# Altium PCB front_pot_plate.PcbDoc
Units mm, origin at the board's own origin, x right, y up, seen from the top; angles counter-clockwise.
Board outline 137.6 x 108 mm, 2 copper layers (Top Layer, Bottom Layer); 26 components, 36 nets, 88 pads, 36 vias.
Unrouted connection lines stored in the file: 1.
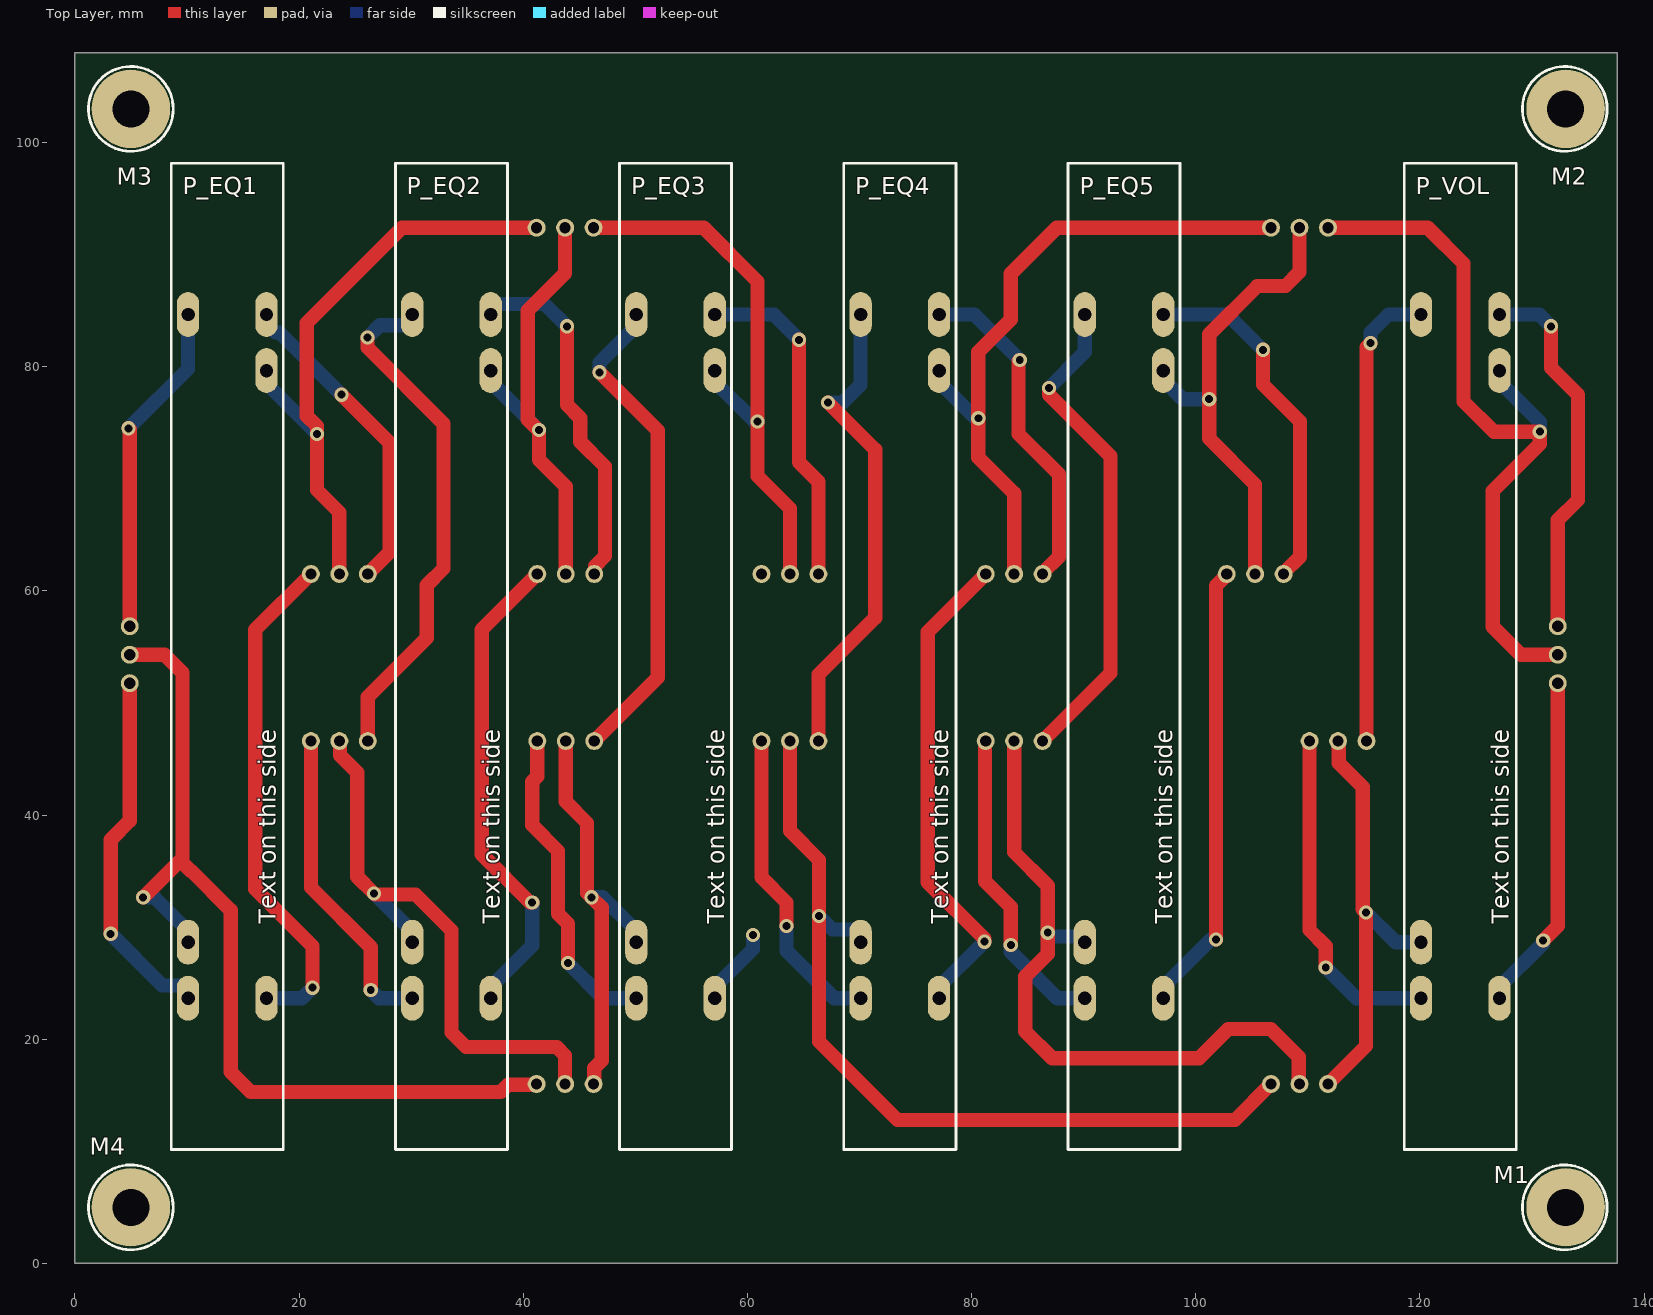
[diagram p0: Top Layer view]
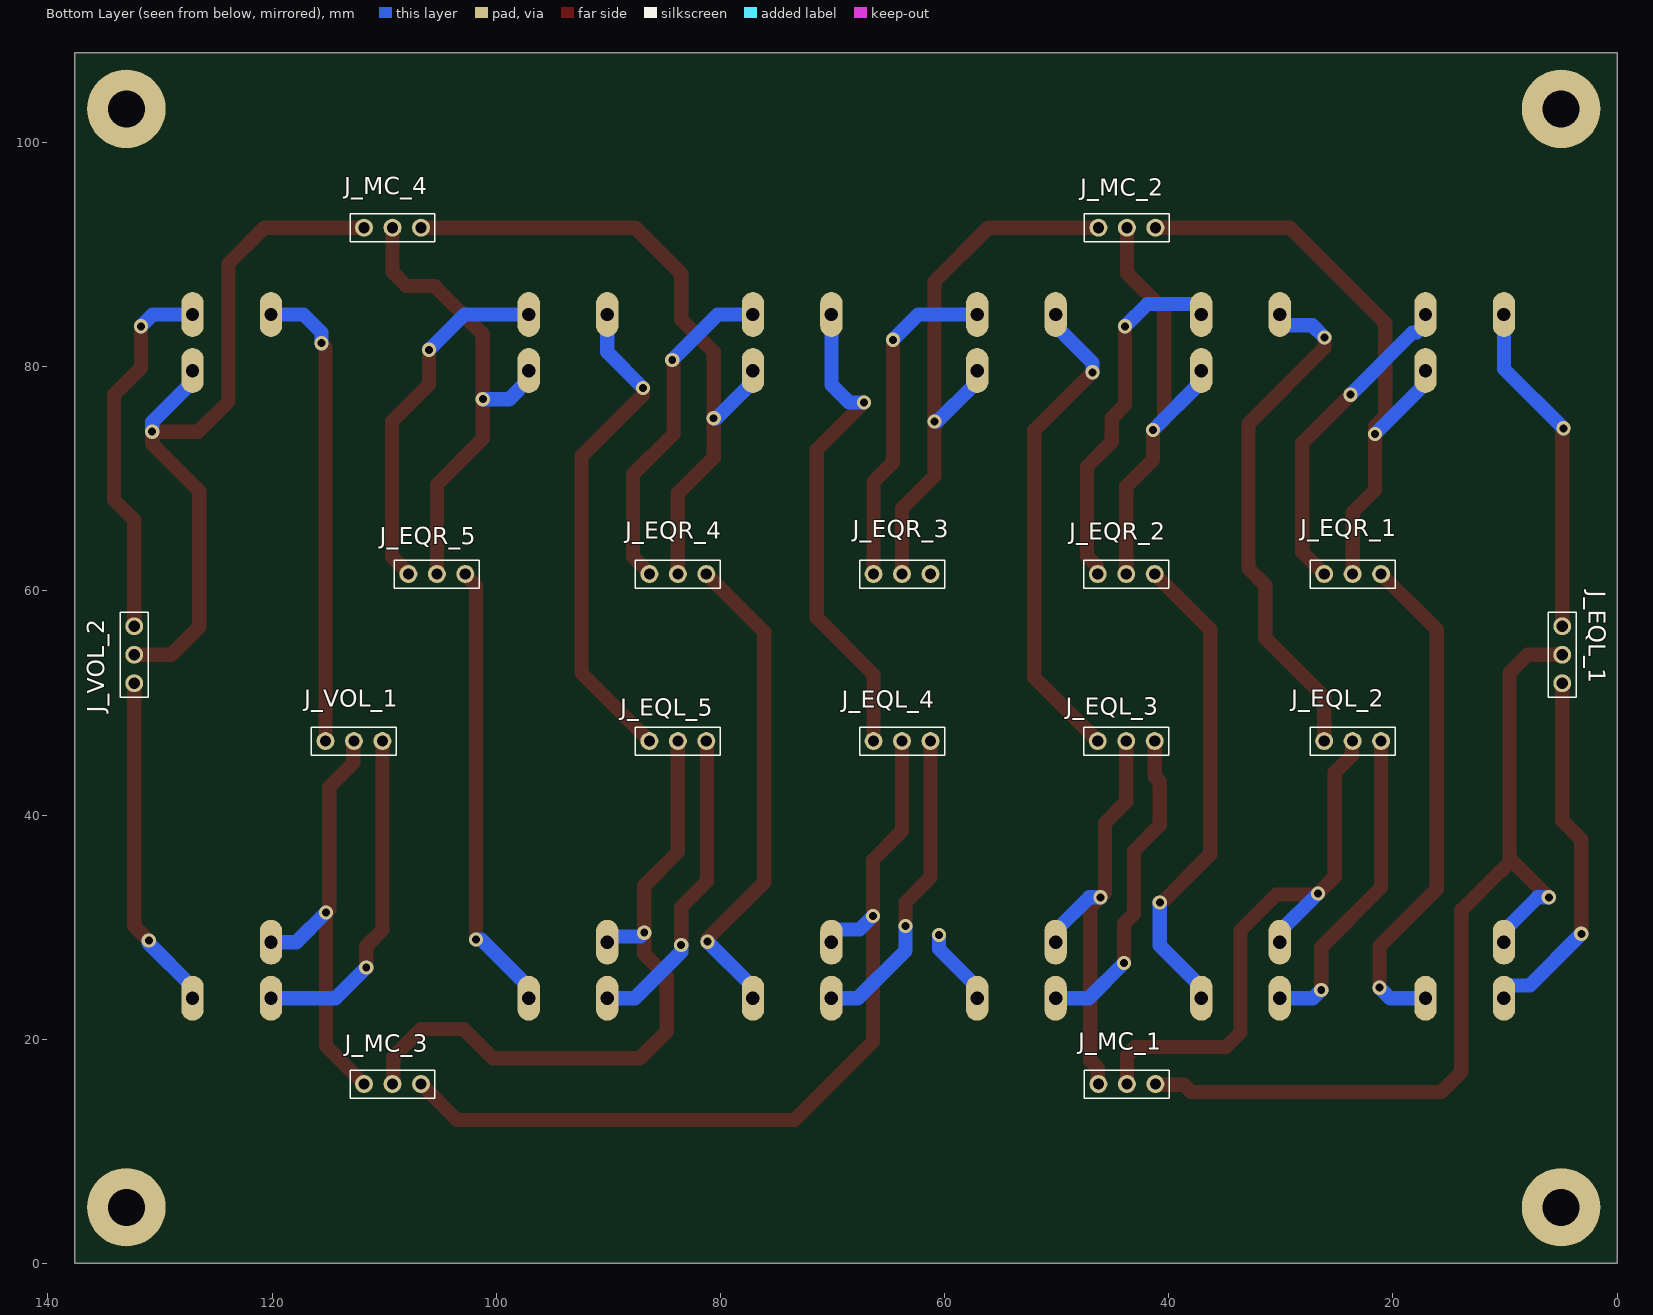
[diagram p1: Bottom Layer view, seen from below]
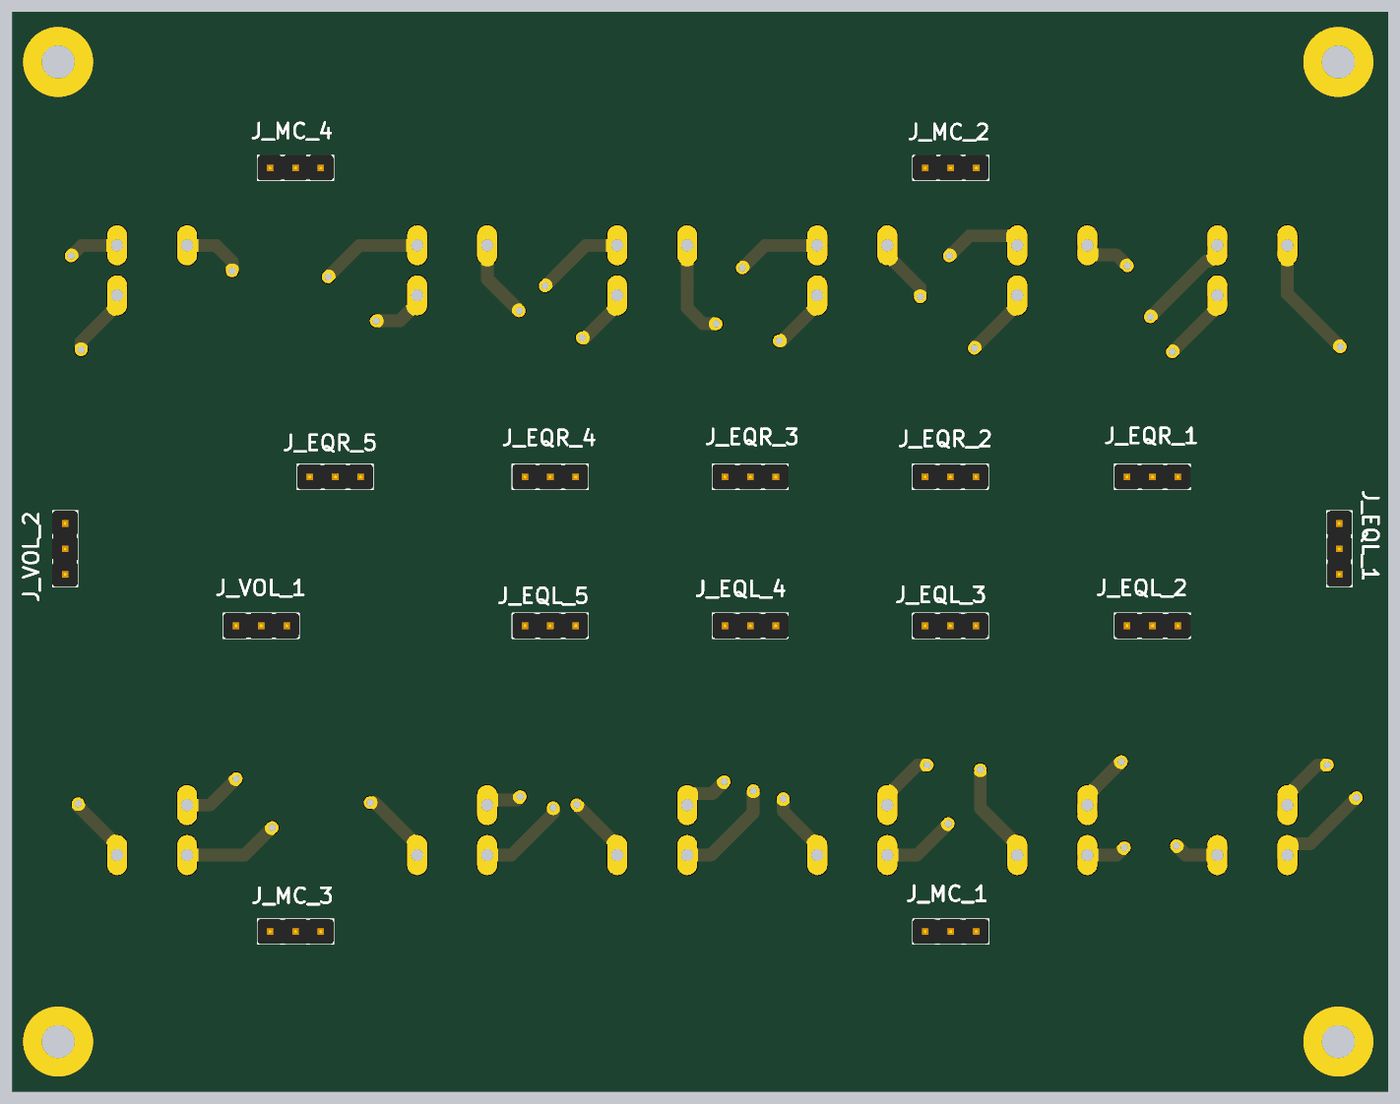
[diagram p2: 3D render of the assembled board from below, using the file's embedded part models]

## Layer stack, top to bottom
Top Solder: solder mask 0.0102, Solder Resist, Dk 3.5
Top Layer: signal copper 0.0356
Dielectric 1: dielectric 0.32, FR-4, Dk 4.8
Bottom Layer: signal copper 0.0356
Bottom Solder: solder mask 0.0102, Solder Resist, Dk 3.5

## Board outline
0,0 137.6,0 137.6,108 0,108

## Design rules (kind name [scope] priority, off if disabled: settings)
Clearance [All] p1: gap=0.254 ignorepadtopadclearanceinfootprint=FALSE except(0: Arc-Hole Track-Hole SMDPad-Hole THPad-Hole Via-Hole Fill-Hole Poly-Hole Region-Hole Text-Hole; 0.508: THPad-THPad; 0.762: Arc-THPad Track-THPad; 1.016: Arc-Arc Arc-Track Arc-Via Track-Track Track-Via)
PolygonConnect [All] p1: connectstyle=Relief reliefconductorwidth=0.254 reliefentries=4 polygonreliefangle="90 Angle" airgapwidth=0.254
RoutingVias [All] p1: holewidth=0.711 width=1.27 viastyle="Through Hole" minholewidth=0.711 minwidth=1.27 maxholewidth=0.711 maxwidth=1.27
SolderMaskExpansion [All] p1: expansion=0.102 istentingtop=FALSE
Width [All] p1: maxlimit=1.27 minlimit=0.762 preferedwidth=1.016 minimp=50.000000 maximp=50.000000 favimp=50.000000
30 further rules are at their usual default settings.

## Components (designator, comment, footprint, x,y, rotation, side; value= is the part's Value field where it differs from the comment)
J_EQL_1 "Header 1x3" "Header 1x3" 4.9,56.84 r270 bottom
J_EQL_2 "Header 1x3" "Header 1x3" 26.14,46.6 r180 bottom
J_EQL_3 "Header 1x3" "Header 1x3" 46.34,46.6 r180 bottom
J_EQL_4 "Header 1x3" "Header 1x3" 66.34,46.6 r180 bottom
J_EQL_5 "Header 1x3" "Header 1x3" 86.34,46.6 r180 bottom
J_EQR_1 "Header 1x3" "Header 1x3" 26.14,61.5 r180 bottom
J_EQR_2 "Header 1x3" "Header 1x3" 46.34,61.5 r180 bottom
J_EQR_3 "Header 1x3" "Header 1x3" 66.34,61.5 r180 bottom
J_EQR_4 "Header 1x3" "Header 1x3" 86.34,61.5 r180 bottom
J_EQR_5 "Header 1x3" "Header 1x3" 107.84,61.5 r180 bottom
J_MC_1 "Header 1x3" "Header 1x3" 41.2,16 r0 bottom
J_MC_2 "Header 1x3" "Header 1x3" 41.2,92.4 r0 bottom
J_MC_3 "Header 1x3" "Header 1x3" 106.72,16 r0 bottom
J_MC_4 "Header 1x3" "Header 1x3" 106.72,92.4 r0 bottom
J_VOL_1 "Header 1x3" "Header 1x3" 115.24,46.6 r180 bottom
J_VOL_2 "Header 1x3" "Header 1x3" 132.3,56.84 r270 bottom
M1 "Screw Hole" "M3 Hole"#1 132.922,5 r0 top
M2 "Screw Hole" "M3 Hole"#1 132.922,103 r0 top
M3 "Screw Hole" "M3 Hole"#2 5,103 r0 top
M4 "Screw Hole" "M3 Hole"#2 5,5 r0 top
P_EQ1 "stereo_pot" "POT STEREO LOOOOONG" 13.6,54.155 r0 top
P_EQ2 "stereo_pot" "POT STEREO LOOOOONG" 33.6,54.155 r0 top
P_EQ3 "stereo_pot" "POT STEREO LOOOOONG" 53.6,54.155 r0 top
P_EQ4 "stereo_pot" "POT STEREO LOOOOONG" 73.6,54.155 r0 top
P_EQ5 "stereo_pot" "POT STEREO LOOOOONG" 93.6,54.155 r0 top
P_VOL "stereo_pot" "POT STEREO LOOOOONG" 123.6,54.155 r0 top

## Footprints (in the part's own frame and the unit in brackets; to place one, negate y for a bottom-side part, rotate by r counter-clockwise, add the part's x,y. Pads: shape width x height; smd on the part's side, far side on the other; paste and mask are expansions set on the pad)
"Header 1x3" [mm]
  round 1.6 hole 1: 1(0,0) 2(2.54,0) 3(5.08,0)
  silkscreen extent -1.25,-1.25 6.33,1.25, body extent -1.26,-1.28 6.36,1.26, height 8.89
"M3 Hole"#1 [mm]
  round 7 hole 3.3 mask+0: 1(0.078,0)
  silkscreen extent -3.78,-3.78 3.79,3.78
"M3 Hole"#2 [mm]
  round 7 hole 3.3 mask+0: 1(0,0)
  silkscreen extent -3.78,-3.78 3.79,3.78
"POT STEREO LOOOOONG" [mm]
  oval 2x4 hole 1.2: 1(-3.5,-30.5) 2(-3.5,30.5) 3(-3.5,-25.5) 4(3.5,-30.5) 5(3.5,30.5) 6(3.5,25.5)
  silkscreen extent -5,-44 5,44

## Via types
v1: diameter 1.27, hole 0.711, Top Layer to Bottom Layer, 36 vias

## Nets (pads, with @x,y where several pads share a name; then routed paths per layer and width w, separated by ;. In a path a pad name is that pad's centre, name@x,y a point inside that pad or via, vN(x,y) a via of type N, cw(c..) or ccw(c..) an arc to the next point about the centre after c; other vN are vias at no path point)
NetJ_EQL_1_1: J_EQL_1.1 P_EQ1.2 | length 30.1
  Top Layer w1.27: v1(4.8,74.5) 4.9,74.4 J_EQL_1.1
  Bottom Layer w1.27: v1(4.8,74.5) 10.1,79.8 P_EQ1.2
NetJ_EQL_1_2: J_EQL_1.2 J_MC_1.1 P_EQ1.3 | length 83
  Top Layer w1.27: J_EQL_1.2 8,54.3 9.6,52.7 9.6,36 ; v1(6.1,32.655) 9.445,36 9.6,36 ; J_MC_1.1 41.137,15.937 38.637,15.937 38,15.3 15.7,15.3 13.9,17.1 13.9,31.5 10.4,35 10.344,35 9.6,35.744 9.6,36
  Bottom Layer w1.27: v1(6.1,32.655) 7.1,32.655 10.1,29.655 P_EQ1.3 P_EQ1.3@10.1,27.853
NetJ_EQL_1_3: J_EQL_1.3 P_EQ1.1 | length 32.8
  Top Layer w1.27: v1(3.2,29.4) 3.2,37.8 4.9,39.5 J_EQL_1.3
  Bottom Layer w1.27: v1(3.2,29.4) 7.805,24.795 9.763,24.795 10.1,24.457 P_EQ1.1
NetJ_EQL_2_1: J_EQL_2.1 P_EQ2.2 | length 46.8
  Top Layer w1.27: v1(26.1,82.6) 26.1,81.7 32.9,74.9 32.9,62 31.4,60.5 31.4,55.8 26.14,50.54 J_EQL_2.1
  Bottom Layer w1.27: v1(26.1,82.6) 27.195,83.695 29.763,83.695 30.1,84.032 P_EQ2.2
NetJ_EQL_2_2: J_EQL_2.2 J_MC_1.2 P_EQ2.3 | length 51.5
  Top Layer w1.27: J_EQL_2.2 23.663,46.537 23.663,45.337 25.2,43.8 25.2,34.5 v1(26.7,33) 26.8,32.9 30.4,32.9 33.6,29.7 33.6,20.6 34.9,19.3 42.996,19.3 43.74,18.556 J_MC_1.2
  Bottom Layer w1.27: v1(26.7,33) 30.1,29.6 P_EQ2.3
NetJ_EQL_2_3: J_EQL_2.3 P_EQ2.1 | length 28.4
  Top Layer w1.27: J_EQL_2.3 21.06,33.54 26.4,28.2 v1(26.4,24.4)
  Bottom Layer w1.27: v1(26.4,24.4) 27.145,23.655 P_EQ2.1
NetJ_EQL_3_1: J_EQL_3.1 P_EQ3.2 | length 43.9
  Top Layer w1.27: J_EQL_3.1 52,52.26 52,74.3 v1(46.8,79.5)
  Bottom Layer w1.27: v1(46.8,79.5) 46.8,80.355 50.1,83.655 P_EQ3.2
NetJ_EQL_3_2: J_EQL_3.2 J_MC_1.3 P_EQ3.3 | length 38.5
  Top Layer w1.27: J_EQL_3.2 43.8,41.2 45.7,39.3 45.7,33.055 v1(46.1,32.655) 47,31.755 47,18.1 46.343,17.443 46.343,16.063 J_MC_1.3
  Bottom Layer w1.27: v1(46.1,32.655) 47.1,32.655 50.1,29.655 P_EQ3.3
NetJ_EQL_3_3: J_EQL_3.3 P_EQ3.1 | length 28.7
  Top Layer w1.27: J_EQL_3.3 41.26,43.435 40.8,42.975 40.8,39.1 43.1,36.8 43.1,31.2 44,30.3 v1(44,26.8)
  Bottom Layer w1.27: v1(44,26.8) 47.145,23.655 P_EQ3.1
NetJ_EQL_4_1: J_EQL_4.1 P_EQ4.2 | length 43.9
  Top Layer w1.27: J_EQL_4.1 66.34,52.54 71.4,57.6 71.4,72.6 v1(67.2,76.8)
  Bottom Layer w1.27: v1(67.2,76.8) 68.51,76.8 70.1,78.39 P_EQ4.2
NetJ_EQL_4_2: J_EQL_4.2 J_MC_3.1 P_EQ4.3 | length 77.6
  Top Layer w1.27: J_EQL_4.2 63.8,38.6 66.4,36 v1(66.4,31) 66.4,19.8 73.4,12.8 103.495,12.8 106.695,16 J_MC_3.1
  Bottom Layer w1.27: v1(66.4,31) 67.605,29.795 69.763,29.795 70.1,29.457 P_EQ4.3
NetJ_EQL_4_3: J_EQL_4.3 P_EQ4.1 | length 28
  Top Layer w1.27: J_EQL_4.3 61.26,34.44 63.5,32.2 v1(63.5,30.1)
  Bottom Layer w1.27: v1(63.5,30.1) 63.5,27.9 67.745,23.655 P_EQ4.1
NetJ_EQL_5_1: J_EQL_5.1 P_EQ5.2 | length 44.2
  Top Layer w1.27: J_EQL_5.1 92.4,52.66 92.4,72 86.9,77.5 v1(86.9,78.1)
  Bottom Layer w1.27: v1(86.9,78.1) 90.1,81.3 P_EQ5.2
NetJ_EQL_5_2: J_EQL_5.2 J_MC_3.2 P_EQ5.3 | length 61.7
  Top Layer w1.27: J_EQL_5.2 83.8,36.7 86.8,33.7 v1(86.8,29.5) 86.8,27.6 84.8,25.6 84.8,20.7 87.2,18.3 100.3,18.3 102.9,20.9 106.7,20.9 109.197,18.403 109.197,16.063 J_MC_3.2
  Bottom Layer w1.27: v1(86.8,29.5) 87.137,29.163 89.763,29.163 90.1,28.826 P_EQ5.3
NetJ_EQL_5_3: J_EQL_5.3 P_EQ5.1 | length 28.1
  Top Layer w1.27: J_EQL_5.3 81.2,46.54 81.2,34.1 83.5,31.8 v1(83.5,28.4)
  Bottom Layer w1.27: v1(83.5,28.4) 83.5,27.8 87.645,23.655 P_EQ5.1
NetJ_EQR_1_1: J_EQR_1.1 P_EQ1.5 | length 28.7
  Top Layer w1.27: v1(23.8,77.5) 28.1,73.2 28.1,63.46 J_EQR_1.1
  Bottom Layer w1.27: P_EQ1.5 17.1,83.853 17.901,83.052 18.248,83.052 v1(23.8,77.5)
NetJ_EQR_1_2: J_EQR_1.2 J_MC_2.1 P_EQ1.6 | length 55.1
  Top Layer w1.27: J_EQR_1.2 23.6,67 21.6,69 v1(21.6,74) 21.6,74.7 20.7,75.6 20.7,83.9 29.2,92.4 J_MC_2.1
  Bottom Layer w1.27: P_EQ1.6 17.1,78.5 v1(21.6,74)
NetJ_EQR_1_3: J_EQR_1.3 P_EQ1.4 | length 45.6
  Top Layer w1.27: J_EQR_1.3 16.1,56.54 16.1,33.4 21.2,28.3 v1(21.2,24.6)
  Bottom Layer w1.27: P_EQ1.4 20.255,23.655 v1(21.2,24.6)
NetJ_EQR_2_1: J_EQR_2.1 P_EQ2.5 | length 32.3
  Top Layer w1.27: v1(43.9,83.6) 43.9,76.6 45.1,75.4 45.1,73.3 47.3,71.1 47.3,63.1 46.403,62.203 46.403,61.563 J_EQR_2.1
  Bottom Layer w1.27: P_EQ2.5 37.1,85.263 37.437,85.6 41.9,85.6 v1(43.9,83.6)
NetJ_EQR_2_2: J_EQR_2.2 J_MC_2.2 P_EQ2.6 | length 40.8
  Top Layer w1.27: J_MC_2.2 43.74,88.34 40.4,85 40.4,75.3 41.345,74.355 v1(41.4,74.355) 41.4,71.7 43.8,69.3 J_EQR_2.2
  Bottom Layer w1.27: P_EQ2.6 37.1,78.655 v1(41.4,74.355)
NetJ_EQR_2_3: J_EQR_2.3 P_EQ2.4 | length 43.4
  Top Layer w1.27: v1(40.8,32.2) 40.6,32.2 36.3,36.5 36.3,56.54 J_EQR_2.3
  Bottom Layer w1.27: P_EQ2.4 37.1,24.655 40.8,28.355 v1(40.8,32.2)
NetJ_EQR_3_1: J_EQR_3.1 P_EQ3.5 | length 30.1
  Top Layer w1.27: v1(64.6,82.4) 64.6,71.48 66.34,69.74 J_EQR_3.1
  Bottom Layer w1.27: P_EQ3.5 62.345,84.655 v1(64.6,82.4)
NetJ_EQR_3_2: J_EQR_3.2 J_MC_2.3 P_EQ3.6 | length 50.2
  Top Layer w1.27: J_MC_2.3 56.1,92.4 60.9,87.6 60.9,70.245 63.8,67.345 J_EQR_3.2
  Bottom Layer w1.27: P_EQ3.6 57.338,79.417 57.338,78.417 60.655,75.1 v1(60.9,75.1)
NetJ_EQR_3_3: J_EQR_3.3 P_EQ3.4 | length 7.1
  Bottom Layer w1.27: P_EQ3.4 57.338,23.893 57.338,24.893 60.5,28.055 v1(60.5,29.3)
NetJ_EQR_4_1: J_EQR_4.1 P_EQ4.5 | length 30.1
  Top Layer w1.27: v1(84.3,80.6) 84.2,80.5 84.2,74 87.8,70.4 87.8,63.049 86.34,61.589 J_EQR_4.1
  Bottom Layer w1.27: P_EQ4.5 80.245,84.655 v1(84.3,80.6)
NetJ_EQR_4_2: J_EQR_4.2 J_MC_4.1 P_EQ4.6 | length 60.1
  Top Layer w1.27: J_EQR_4.2 83.8,68.7 80.6,71.9 v1(80.6,75.4) 80.6,81.3 83.5,84.2 83.5,88.3 87.6,92.4 J_MC_4.1
  Bottom Layer w1.27: P_EQ4.6 77.1,78.655 80.355,75.4 v1(80.6,75.4)
NetJ_EQR_4_3: J_EQR_4.3 P_EQ4.4 | length 43.7
  Top Layer w1.27: v1(81.145,28.7) 81.145,28.955 76.1,34 76.1,56.34 J_EQR_4.3
  Bottom Layer w1.27: P_EQ4.4 77.1,24.655 v1(81.145,28.7)
NetJ_EQR_5_1: J_EQR_5.1 P_EQ5.5 | length 32.2
  Top Layer w1.27: v1(106,81.5) 106,78.4 109.3,75.1 109.3,63.049 107.84,61.589 J_EQR_5.1
  Bottom Layer w1.27: P_EQ5.5 102.845,84.655 v1(106,81.5)
NetJ_EQR_5_2: J_EQR_5.2 J_MC_4.2 P_EQ5.6 | length 43
  Top Layer w1.27: J_EQR_5.2 105.3,69.5 101.2,73.6 v1(101.2,77.1) 101.2,82.9 105.5,87.2 108,87.2 109.26,88.46 J_MC_4.2
  Bottom Layer w1.27: P_EQ5.6 97.1,78.853 98.853,77.1 v1(101.2,77.1)
NetJ_EQR_5_3: J_EQR_5.3 P_EQ5.4 | length 40.5
  Top Layer w1.27: v1(101.8,28.9) 101.8,60.451 102.76,61.411 J_EQR_5.3
  Bottom Layer w1.27: P_EQ5.4 97.1,24.655 101.345,28.9 v1(101.8,28.9)
NetJ_MC_3_3: J_MC_3.3 J_VOL_1.2 P_VOL.3 | length 39
  Top Layer w1.27: J_MC_3.3 115.2,19.4 v1(115.2,31.3) 114.9,31.6 114.9,42.5 112.763,44.637 112.763,46.537 J_VOL_1.2
  Bottom Layer w1.27: v1(115.2,31.3) 117.845,28.655 P_VOL.3
NetJ_MC_4_3: J_MC_4.3 J_VOL_2.2 P_VOL.6 | length 66.6
  Top Layer w1.27: J_MC_4.3 120.7,92.4 123.9,89.2 123.9,76.9 126.6,74.2 v1(130.7,74.2) 130.7,73.1 126.5,68.9 126.5,56.8 129,54.3 J_VOL_2.2
  Bottom Layer w1.27: P_VOL.6 127.1,78.655 130.7,75.055 v1(130.7,74.2)
NetJ_VOL_1_1: J_VOL_1.1 P_VOL.2 | length 41.8
  Top Layer w1.27: J_VOL_1.1 115.24,81.74 v1(115.6,82.1)
  Bottom Layer w1.27: v1(115.6,82.1) 115.6,83.06 117.195,84.655 P_VOL.2
NetJ_VOL_1_3: J_VOL_1.3 P_VOL.1 | length 30.4
  Top Layer w1.27: J_VOL_1.3 110.16,29.74 111.6,28.3 v1(111.6,26.4)
  Bottom Layer w1.27: v1(111.6,26.4) 114.345,23.655 P_VOL.1
NetJ_VOL_2_1: J_VOL_2.1 P_VOL.5 | length 33.5
  Top Layer w1.27: v1(131.7,83.6) 131.7,79.9 134.1,77.5 134.1,68.115 132.3,66.315 J_VOL_2.1
  Bottom Layer w1.27: P_VOL.5 130.645,84.655 v1(131.7,83.6)
NetJ_VOL_2_3: J_VOL_2.3 P_VOL.4 | length 30.3
  Top Layer w1.27: v1(131,28.8) 132.3,30.1 J_VOL_2.3
  Bottom Layer w1.27: P_VOL.4 127.1,24.655 131,28.555 v1(131,28.8)
pads on no net: M1.1 M2.1 M3.1 M4.1

## Text inside footprints (layer, text, board x,y; h text height)
P_EQ1: Top Overlay "Text on this side" at 17.918,30.279 h1.52 r90
P_EQ2: Top Overlay "Text on this side" at 37.918,30.279 h1.52 r90
P_EQ3: Top Overlay "Text on this side" at 57.918,30.279 h1.52 r90
P_EQ4: Top Overlay "Text on this side" at 77.918,30.279 h1.52 r90
P_EQ5: Top Overlay "Text on this side" at 97.918,30.279 h1.52 r90
P_VOL: Top Overlay "Text on this side" at 127.918,30.279 h1.52 r90